# Allegro board ZM5202_PL2303.brd
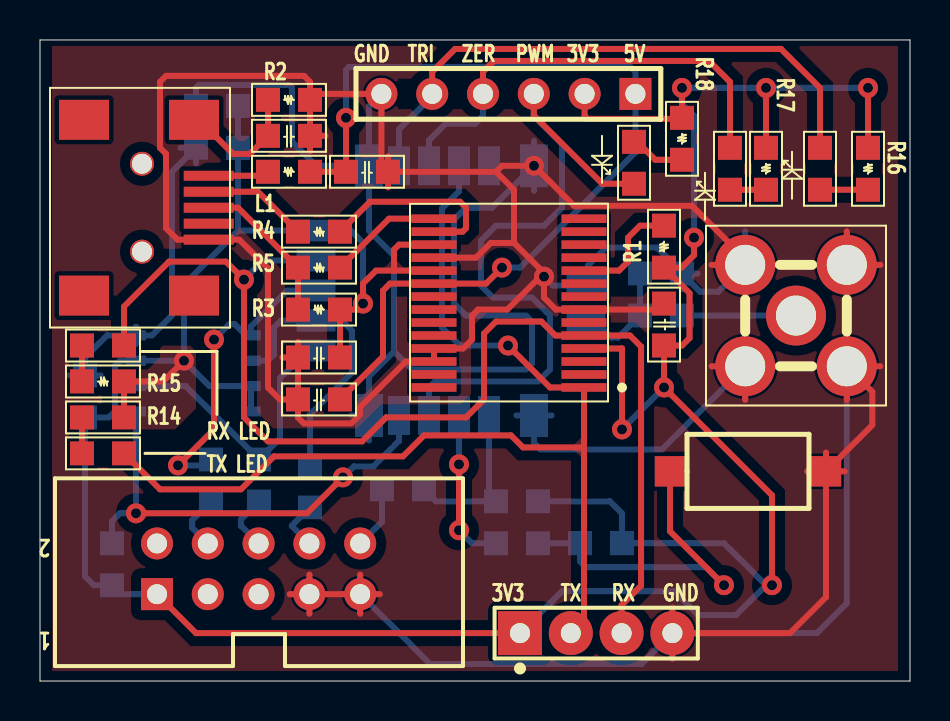
[diagram p0: board, top side]
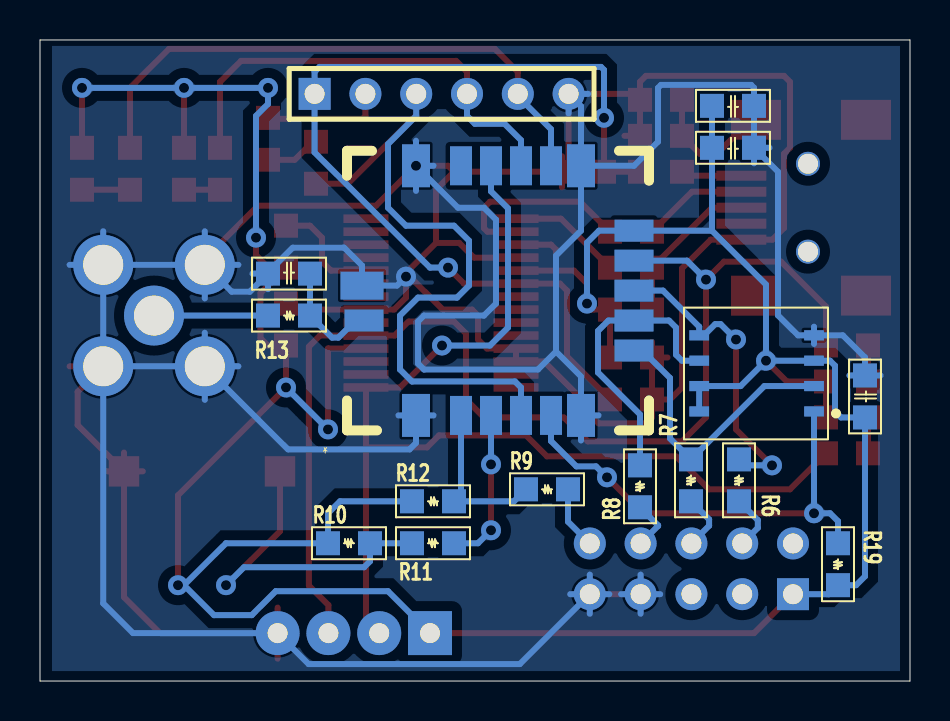
[diagram p1: board, bottom side, seen from below]

Outline 43.5 x 32.1 mm; copper layers: TOP, BOTTOM. Coordinates in mm from the lower left corner of the outline.
Outline path: 0,32.1 0,0 43.5,0 43.5,32.1 0,32.1

## Design rules (mm)
constraint set DEFAULT: min track width 0.3

## Placement (name value [footprint] x y rotation side)
C1  10uF  [CAP_SMD_0805]  15.3 25.5 0 top
C2  0.1uF  [CAP_SMD_0805]  31.2 16.8 90 top
C3  0.1uF  [CAP_SMD_0805]  12.9 14.1 0 top
C4  0.1uF  [CAP_SMD_0805]  12.9 16.2 0 top
C5  4.7nF  [CAP_SMD_0805]  11.4 27.3 0 top
C6  33pF  [CAP_SMD_0805]  30 20.4 0 bottom
C7  33nF  [CAP_SMD_0805]  9.9 26.7 180 bottom
C8  4.7uF  [CAP_SMD_0805]  9.9 28.8 180 bottom
C9  33nF  [CAP_SMD_0805]  2.25 13.2 90 bottom
D1  TX LED  [LED_SMD_0805]  4.2 11.4 180 top
D2  RX LED  [LED_SMD_0805]  4.2 16.8 180 top
D3  TRIAC LED  [LED_SMD_0805]  39 26.7 270 top
D4  ZEROX LED  [LED_SMD_0805]  34.5 26.7 270 top
D5  PWM LED  [LED_SMD_0805]  29.7 24.9 90 top
J1  ZWAVE SERIAL  [J1_4_254]  24 2.4 0 top
J2  ZWAVE ISP  [HEADER5X2X254]  5.85 4.35 180 top
J3  GPIO  [J1_6_254]  28.5 29.4 180 top
L1  INDUCTOR  [RES_SMD_0805]  11.4 25.5 0 top
R1  4.7K  [RES_SMD_0805]  31.2 20.7 90 top
R2  1M  [RES_SMD_0805]  11.4 29.1 0 top
R3  1.5K  [RES_SMD_0805]  12.9 18.6 0 top
R4  27R  [RES_SMD_0805]  15 22.5 180 top
R5  27R  [RES_SMD_0805]  15 20.7 180 top
R6  27R  [RES_SMD_0805]  8.55 9 90 bottom
R7  27R  [RES_SMD_0805]  10.95 9 90 bottom
R8  27R  [RES_SMD_0805]  13.5 8.7 90 bottom
R9  27R  [RES_SMD_0805]  17.1 9.6 0 bottom
R10  10K  [RES_SMD_0805]  29.1 6.9 180 bottom
R11  1K  [RES_SMD_0805]  24.9 6.9 180 bottom
R12  10K  [RES_SMD_0805]  22.8 9 0 bottom
R13  0R  [RES_SMD_0805]  30 18.3 0 bottom
R14  330R  [RES_SMD_0805]  4.2 13.2 180 top
R15  330R  [RES_SMD_0805]  4.2 15 180 top
R16  330R  [RES_SMD_0805]  41.4 26.7 270 top
R17  330R  [RES_SMD_0805]  36.3 26.7 270 top
R18  330R  [RES_SMD_0805]  32.1 28.2 270 top
R19  10K  [RES_SMD_0805]  3.6 4.8 90 bottom
SW1  SW_PB_SPST  [SMD_2PIN_BUTTON]  35.4 10.5 0 top
U1  MiniUSB  [MINI_USB]  5.1 23.7 270 top
U2  PL2303-HX_SSOP28  [SSOP28]  26.7 14.7 180 top
U3  ZM5202AU-CME3R  [ZM5202]  13.8 25.8 0 bottom
U4  5-1814832-1  [RF_ANTENA]  37.8 18.3 270 top
U5  25LC128-I/SN  [SOIC_8]  4.8 13.5 90 bottom

## Library data of the parts
C1-C9 = CAPACITOR NON-POL
D1-D5 = LED
J1 = CON4
J2 = CON10
J3 = CON6
L1 = INDUCTOR
R1-R19 = R
SW1 = SW_PB_SPST
U1 = Mini USB
U2 = PL2303-HX_SSOP28
U3 = ZM5202
U4 = RF-Antena
U5 = SPI EPPROM SOIC-8

## Footprints (pads in the part's own frame, mm; a bottom-side part is the same pattern mirrored in y, then rotated)
CAP_SMD_0805
  rect 1.2x1.2 smd: 1(0,0) 2(2.1,0)
HEADER5X2X254
  rect 1.6x1.6 hole 1: 1(0,0)
  round 1.6 hole 1: 2(0,-2.54) 3(-2.54,0) 4(-2.54,-2.54) 5(-5.08,0) 6(-5.08,-2.54) 7(-7.62,0) 8(-7.62,-2.54) 9(-10.16,0) 10(-10.16,-2.54)
J1_4_254
  rect 2.2x2.2 hole 1: 1(0,0)
  round 2.2 hole 1: 2(2.54,0) 3(5.08,0) 4(7.62,0)
J1_6_254
  rect 1.6x1.6 hole 1: 1(-1.27,0)
  round 1.6 hole 1: 2(1.27,0) 3(3.81,0) 4(6.35,0) 5(8.89,0) 6(11.43,0)
LED_SMD_0805
  rect 1.2x1.2 smd: 1(0,0) 2(2.1,0)
MINI_USB
  rect 0.5x2.5 smd: 1(-1.6,3.336) 2(-0.8,3.336) 3(0,3.336) 4(0.8,3.336) 5(1.6,3.336)
  rect 2x2.5 smd: 6(4.4,2.6) 7(-4.4,2.6) 8(-4.4,-2.9) 9(4.4,-2.9)
  round 1.2 hole 1: 10(2.2,0) 11(-2.2,0)
RES_SMD_0805
  rect 1.2x1.2 smd: 1(0,0) 2(2.1,0)
RF_ANTENA
  round 3 hole 2: 1(0,0) 2(-2.54,2.54) 3(2.54,2.54) 4(2.54,-2.54) 5(-2.54,-2.54)
SMD_2PIN_BUTTON
  rect 1.524x1.524 smd: 1(-3.9,0) 2(3.9,0)
SOIC_8
  rect 0.51x0.99 smd: 1(0,0) 2(1.27,0) 3(2.54,0) 4(3.81,0) 5(3.81,5.74) 6(2.54,5.74) 7(1.27,5.74) 8(0,5.74)
SSOP28
  rect 2.25x0.43 smd: 1(-0.5,0) 2(-0.5,-0.65) 3(-0.5,-1.3) 4(-0.5,-1.95) 5(-0.5,-2.6) 6(-0.5,-3.25) 7(-0.5,-3.9) 8(-0.5,-4.55) 9(-0.5,-5.2) 10(-0.5,-5.85) 11(-0.5,-6.5) 12(-0.5,-7.15) 13(-0.5,-7.8) 14(-0.5,-8.45) 15(7,-8.45) 16(7,-7.8) 17(7,-7.15) 18(7,-6.5) 19(7,-5.85) 20(7,-5.2) 21(7,-4.55) 22(7,-3.9) 23(7,-3.25) 24(7,-2.6) 25(7,-1.95) 26(7,-1.3) 27(7,-0.65) 28(7,0)
ZM5202
  rect 1.4x2.15 smd: 1(10.9,12.5) 6(2.65,12.5) 12(2.65,0) 17(10.9,0)
  rect 1.1x1.95 smd: 2(8.65,12.5) 3(7.15,12.5) 4(5.65,12.5) 5(4.15,12.5) 13(4.15,0) 14(5.65,0) 15(7.15,0) 16(8.65,0)
  rect 1.95x1.1 smd: 7(0,9.25) 8(0,7.75) 9(0,6.25) 10(0,4.75) 11(0,3.25) 19(13.5,7.75)
  rect 2.15x1.4 smd: 18(13.6,6)

## Nets
3V3: C2.1 C4.2 C7.1 C8.1 C9.1 J1.1 J2.1 J3.2 R1.1 R3.2 R10.1 R12.2 R14.1 R15.1 R16.1 R17.1 R18.1 R19.1 U2.4 U2.17(VO_33) U2.19 U3.11 U5.3(W\P) U5.7 U5.8
5V: C1.1 C3.2 J3.1 L1.2 U2.20
GND: C1.2 C2.2 C3.1 C4.1 C5.2 C6.2 C7.2 C8.2 C9.2 J1.4 J2.7 J2.9 J3.6 R2.2 SW1.2 U1.5 U2.7 U2.18 U2.25 U2.26 U3.1 U3.6 U3.12 U3.17 U3.18 U4.2 U4.3 U4.4 U4.5 U5.4
DM: R4.2 U1.2
DP: R3.1 R5.2 U1.3
MISO: R7.2 U3.7 U5.2
MOSI: R6.2 U3.9 U5.5
P1.5: R19.2 U3.5 U5.1
PWM: D5.1(CATHODE) J3.3 U3.4
RX: D2.1(CATHODE) J1.3 U2.5 U3.10
SCK: R8.2 U3.8 U5.6
TRIAC: D3.1(CATHODE) J3.5 U3.13
TX: D1.1(CATHODE) J1.2 U2.1 U3.15
ZEROX: D4.1(CATHODE) J3.4 U3.14
ZWAVE_RESET: R9.2 R12.1 U3.2
N39079: R10.2 R11.1 SW1.1
N39229: R11.2 U3.3
N39287: C5.1 R2.1 U1.7
N39473: C6.1 R13.1 U3.19
N39481: R13.2 U4.1(RF)
N41115: L1.1 U1.1
N42507: R4.1 U2.16
N42519: R5.1 U2.15
N42807: R1.2 U2.10
N396251: D3.2 R16.2
N396411: D4.2 R17.2
N396571: D5.2 R18.2
N403273: J2.4 R6.1
N403275: J2.6 R7.1
N403277: J2.8 R8.1
N403279: J2.10 R9.1
N460581: D1.2 R14.2
N460921: D2.2 R15.2

Pads without a net: J2 2 3 5; U1 4 6 8 9 10 11; U2 2 3 6 8 9 11 12 13 14 21 22 23 24 27 28; U3 16

## Via types
v1: diameter 1, hole 0.5, TOP to BOTTOM, 22 vias

## Routing (per net, layer and track width the routed paths; a pad name or vN(x,y) marks a point on that pad's centre or on a via; arc(x,y) is an arc through that point)
3V3: length 174.3
  TOP w0.3: v1(29.1,12.6) 29.1,16.65 U2.4 ; C4.2 R3.2 15.85,18.6 v1(16.15,18.9) 16.15,19.9 16.8,20.55 17.7,20.55 ; v1(32.1,29.7) R18.1 32.05,28.15 27.38,28.15 27.23,28.3 J3.2 ; v1(36.6,4.8) 36.6,9.3 v1(31.2,14.7) C2.1 32.1,16.8 32.48,17.17 32.48,19.42 R1.1 32.08,20.7 32.7,21.32 v1(32.7,22.2) ; 17.7,20.55 17.7,21.6 17.95,21.85 U2.17 ; 17.7,20.55 U2.19 ; R16.1 v1(41.4,29.7) ; J2.1 7.8,2.4 J1.1 ; v1(7.2,16.04) 6.16,15 R15.1 R14.1 ; R17.1 v1(36.3,29.7)
  BOTTOM w0.3: 36.3,4.8 34.8,3.3 32.91,3.3 31.71,4.5 26.1,4.5 J1.1 ; 36.3,4.8 v1(36.6,4.8) ; 36.3,4.8 34.2,6.9 R10.1 29.1,8.4 28.5,9 R12.2 ; 9.9,22.55 7.2,19.85 v1(7.2,16.04) ; 9.9,22.55 C7.1 C8.1 ; 9.9,22.55 U3.11 15.55,22.55 16.15,21.95 v1(16.15,18.9) ; v1(31.2,14.7) v1(29.1,12.6) ; v1(7.2,16.04) U5.3 4,16.04 3.75,15.79 3.75,13.5 3.45,13.2 C9.1 2.25,5.25 2.7,4.8 R19.1 4.05,4.35 J2.1 ; v1(7.2,16.04) 8.47,14.77 U5.7 U5.8 ; v1(41.4,29.7) v1(36.3,29.7) v1(32.1,29.7) 32.1,28.9 32.7,28.3 v1(32.7,22.2)
5V: length 47.4
  TOP w0.3: v1(15.3,28.2) C1.1 L1.2 ; C3.2 17.15,16.25 17.15,19.55 17.5,19.9 U2.20 22.3,19.9 v1(23.1,20.7)
  BOTTOM w0.3: v1(23.1,20.7) 24,20.7 29.77,26.47 J3.1 29.77,30.5 29.52,30.75 15.45,30.75 15.3,30.6 v1(15.3,28.2)
GND: length 349.6
  TOP w0.3: C1.2 22.8,25.5 ; C1.2 17.4,24.72 ; C1.2 17.07,25.83 J3.6 13.8,29.4 R2.2 ; C1.2 17.4,26.28 ; 22.8,25.5 23.7,24.6 23.7,21.94 ; 22.8,25.5 23.1,25.8 v1(24.7,25.8) 26.7,23.8 32.6,23.8 35.26,21.14 U4.5 ; U4.2 42.02,20.84 ; U4.2 38.66,20.84 ; U4.2 40.34,22.52 ; U4.2 40.34,19.16 ; C4.1 12.9,16.98 ; C4.1 12.12,16.2 ; C4.1 C3.1 ; 13.47,3.37 J2.7 ; J2.7 13.47,5.33 ; J2.7 12.49,4.35 ; J2.7 J2.9 ; 23.7,21.94 25.05,20.59 25.05,20.29 23.36,18.6 21.9,18.6 21.6,18.3 21.6,17.1 21.15,16.65 U2.25 U2.26 18.3,16 16,13.7 16,13.33 15.57,12.9 13.2,12.9 12.9,13.2 C3.1 ; 23.7,21.94 22.54,21.94 21.8,21.2 U2.18 ; U4.4 36.94,15.76 ; U4.4 35.26,14.08 ; U4.4 33.58,15.76 ; U4.4 35.26,17.44 ; J1.4 37.5,2.4 39.3,4.2 SW1.2 ; J1.4 31.62,3.68 ; J1.4 31.62,1.12 ; C3.1 12,14.1 11.4,14.7 11.4,20.66 9.96,22.1 U1.5 6.88,22.1 6.3,22.68 6.3,26.4 6,26.7 6,30 6.3,30.3 13.2,30.3 13.5,30 R2.2 ; J2.9 16.99,4.35 ; J2.9 16.01,5.33 ; J2.9 16.01,3.37 ; 38.36,10.5 SW1.2 ; SW1.2 41.62,12.82 41.62,14.48 U4.3 ; SW1.2 40.24,10.5 ; SW1.2 39.3,11.44 ; C2.2 30.9,18.6 U2.7 25.8,18.6 25.2,19.2 v1(25.2,20.25) ; 38.66,15.76 U4.3 ; U4.3 40.34,17.44 ; U4.3 42.02,15.76 ; U4.3 40.34,14.08 ; U4.5 35.26,19.16 ; U4.5 33.58,20.84 ; U4.5 36.94,20.84 ; C5.2 14.28,27.3 ; C5.2 R2.2 ; C5.2 13.5,26.52
  BOTTOM w0.3: U4.4 31.1,11.6 25.02,11.6 24.7,11.92 U3.1 ; U4.4 35.26,14.08 ; U4.4 35.26,17.44 ; U4.4 33.58,15.76 ; U4.4 U4.3 ; 4.8,16.88 U5.4 ; U5.4 5.6,17.31 6.6,18.31 6.6,25.5 C7.2 ; U5.4 3.36,17.31 2.25,16.2 C9.2 ; U5.4 4.8,17.74 ; U4.5 33.92,19.5 33,19.5 C6.2 ; U4.5 U4.2 ; U4.5 35.26,19.16 ; U4.5 35.26,22.52 ; U4.5 33.58,20.84 ; 15.03,4.35 J2.9 ; J2.9 16.01,5.33 ; J2.9 16.01,3.37 ; J2.9 16.99,4.35 ; J2.9 19.51,0.85 30.07,0.85 J1.4 38.85,2.4 40.34,3.89 U4.3 ; J2.7 14.45,4.35 ; J2.7 13.47,5.33 ; J2.7 12.49,4.35 ; J2.7 13.47,3.37 ; U4.2 U4.3 ; U4.2 42.02,20.84 ; U4.2 40.34,22.52 ; v1(24.7,25.8) 22.6,23.7 21.3,23.7 20.7,23.1 20.7,18.9 21.3,18.3 24.3,18.3 24.6,18 24.6,15.9 24.3,15.6 18.6,15.6 17.7,16.5 ; v1(24.7,25.8) 23.82,25.8 ; v1(24.7,25.8) 24.7,27.05 ; v1(24.7,25.8) 24.7,24.55 ; U3.12 16.45,22.55 17.7,21.3 17.7,16.5 ; U3.12 16.45,28.78 J3.6 ; U3.12 13.8,25.8 12.6,27 12.6,29.7 12.45,29.85 7.95,29.85 7.8,29.7 C8.2 C7.2 ; 16.45,12.05 U3.6 ; U3.6 16.45,15.25 17.7,16.5 ; U3.6 15.57,13.3 ; C6.2 32.88,20.4 ; C6.2 32.1,19.62 ; C6.2 32.1,20.46 30.86,21.7 28.3,21.7 27.4,20.8 U3.18 25.65,19.8 v1(25.2,20.25) ; 7.8,25.92 C7.2 ; C7.2 7.02,26.7 ; 16.09,29.4 J3.6 ; J3.6 17.07,28.42 ; 23.82,13.3 U3.1 ; U3.1 25.58,13.3 ; C9.2 1.47,15.3 ; C9.2 3.03,15.3
DM: length 5.3
  TOP w0.3: U1.2 10.9,24.5 R4.2
DP: length 7.8
  TOP w0.3: U1.3 9.9,23.7 R5.2 R3.1
MISO: length 14.5
  BOTTOM w0.3: U5.2 7.28,14.77 R7.2 12,12.15 12,15.17 13.38,16.55 U3.7
MOSI: length 15.7
  TOP w0.3: v1(6.9,10.8) 8.7,12.6 v1(8.7,17.1)
  BOTTOM w0.3: v1(8.7,17.1) 9.47,17.87 9.74,17.87 10.3,17.31 U5.5 10.54,17.74 12.35,19.55 U3.9 ; R6.2 8.25,10.8 v1(6.9,10.8)
P1.5: length 23.5
  TOP w0.3: v1(4.8,8.4) 13.35,8.4 v1(15.15,10.2)
  BOTTOM w0.3: v1(15.15,10.2) 15.7,10.75 16.68,10.75 17.95,12.02 U3.5 ; U5.1 v1(4.8,8.4) 4,8.4 3.6,8 R19.2
PWM: length 35.4
  TOP w0.3: D5.1 28.11,24.9 24.69,28.32 J3.3
  BOTTOM w0.3: U3.4 19.45,14.7 19.75,15 24.9,15 25.5,15.6 25.5,18.3 24.6,19.2 22.65,19.2 22.05,19.8 22.05,22.05 22.8,22.8 25.2,22.8 26.1,23.7 26.1,26.89 24.69,28.3 J3.3
RX: length 60.2
  TOP w0.3: D2.1 4.2,18.75 6.45,21 9.3,21 v1(10.2,20.1) 10.2,13.2 11.4,12 16.11,12 17.31,13.2 21.3,13.2 22.2,14.1 22.2,17.4 22.8,18 25.07,18 25.77,17.3 U2.5 29.5,17.3 30.05,16.75 30.05,4.78 29.08,3.8 J1.3
  BOTTOM w0.3: v1(10.2,20.1) 11.15,21.05 U3.10
SCK: length 14.5
  BOTTOM w0.3: R8.2 13.5,13.35 15.6,15.45 15.6,17.53 15.08,18.05 U3.8 12.05,18.05 11.7,17.7 11.7,16.34 11.4,16.04 U5.6
TRIAC: length 29.1
  TOP w0.3: D3.1 39,29.7 37.05,31.65 20.76,31.65 19.61,30.5 J3.5
  BOTTOM w0.3: J3.5 19.61,29.29 17.95,27.63 U3.13
TX: length 54.5
  TOP w0.3: D1.1 6,9.6 10.05,9.6 11.7,11.25 18.15,11.25 19.2,12.3 23.55,12.3 24.15,11.7 27.2,11.7 ; 27.2,11.7 U2.1 25.5,14.7 v1(23.4,16.8) ; 27.2,11.7 27.2,3.06 J1.2
  BOTTOM w0.3: U3.15 20.95,24.52 20.1,23.67 20.1,17.7 21,16.8 v1(23.4,16.8)
ZEROX: length 23
  TOP w0.3: D4.1 34.5,30 33.45,31.05 22.7,31.05 22.15,30.5 J3.4
  BOTTOM w0.3: J3.4 22.15,28.3 21.75,27.9 20.27,27.9 19.45,27.08 U3.14
ZWAVE_RESET: length 8.3
  BOTTOM w0.3: U3.2 22.45,9.35 R12.1 19.8,9 R9.2
N39079: length 17.5
  TOP w0.3: SW1.1 31.5,7.5 v1(34.2,4.8)
  BOTTOM w0.3: R11.1 R10.2 27,6 27.3,5.7 33.3,5.7 v1(34.2,4.8)
N39229: length 7.9
  TOP w0.3: v1(20.95,10.85) v1(20.95,7.55)
  BOTTOM w0.3: U3.3 v1(20.95,10.85) ; R11.2 21.6,6.9 v1(20.95,7.55)
N39287: length 6.6
  TOP w0.3: U1.7 7.95,28.1 9.65,26.4 10.5,26.4 C5.1 R2.1
N39473: length 5.6
  BOTTOM w0.3: U3.19 27.72,18.05 28.58,17.2 28.9,17.2 R13.1 C6.1
N39481: length 5.7
  BOTTOM w0.3: R13.2 U4.1
N41115: length 3
  TOP w0.3: L1.1 11.2,25.3 U1.1
N42507: length 9.7
  TOP w0.3: U2.16 21.13,22.5 21.3,22.67 21.3,23.7 21,24 16.5,24 R4.1
N42519: length 5.7
  TOP w0.3: U2.15 17.45,23.15 R5.1
N42807: length 5.6
  TOP w0.3: U2.10 28.95,20.55 29.4,21 29.4,22.2 30,22.8 R1.2
N396251: length 2.4
  TOP w0.3: D3.2 R16.2
N396411: length 1.8
  TOP w0.3: D4.2 R17.2
N396571: length 2.8
  TOP w0.3: D5.2 29.86,27 30.76,26.1 R18.2
N403273: length 2.8
  BOTTOM w0.3: R6.1 7.61,8.06 7.61,7.67 J2.4
N403275: length 2.9
  BOTTOM w0.3: J2.6 10.05,7.77 10.05,8.1 R7.1
N403277: length 2.5
  BOTTOM w0.3: J2.8 12.6,7.76 12.6,7.8 R8.1
N403279: length 3.2
  BOTTOM w0.3: J2.10 17.1,7.98 R9.1
N460581: length 1.8
  TOP w0.3: R14.2 D1.2
N460921: length 1.8
  TOP w0.3: D2.2 R15.2

## Copper pours and planes (outline as drawn; the poured copper is in the pictures)
3V3 on TOP: 7.8,16.5 7.8,13.65 6.75,12.6 3.75,12.6 3.6,12.75 3.6,15.45 3.75,15.6 5.4,15.6 6,16.2 6,16.65 6.15,16.8 7.5,16.8
GND on TOP: 0.6,0.5 0.6,31.8 42.9,31.8 42.9,0.5 ; 19 cut-outs
GND on BOTTOM: 0.5,0.5 0.5,31.8 42.9,31.8 42.9,0.5 ; 20 cut-outs

Small or netless copper shapes (teardrops, artwork), in the pictures only: 25 on TOP, 20 on BOTTOM

## Text on the board
Ref Des/Silkscreen Top: RX LED | TX LED | GND | TRI | ZER | 3V3 | PWM | TX | RX
